# Altium PCB smol.PcbDoc
Units mil, origin at the board's own origin, x right, y up, seen from the top; angles counter-clockwise.
Board outline 835 x 1335 mil, 2 copper layers (Top Layer, Bottom Layer); 16 components, 10 nets, 49 pads, 22 vias.
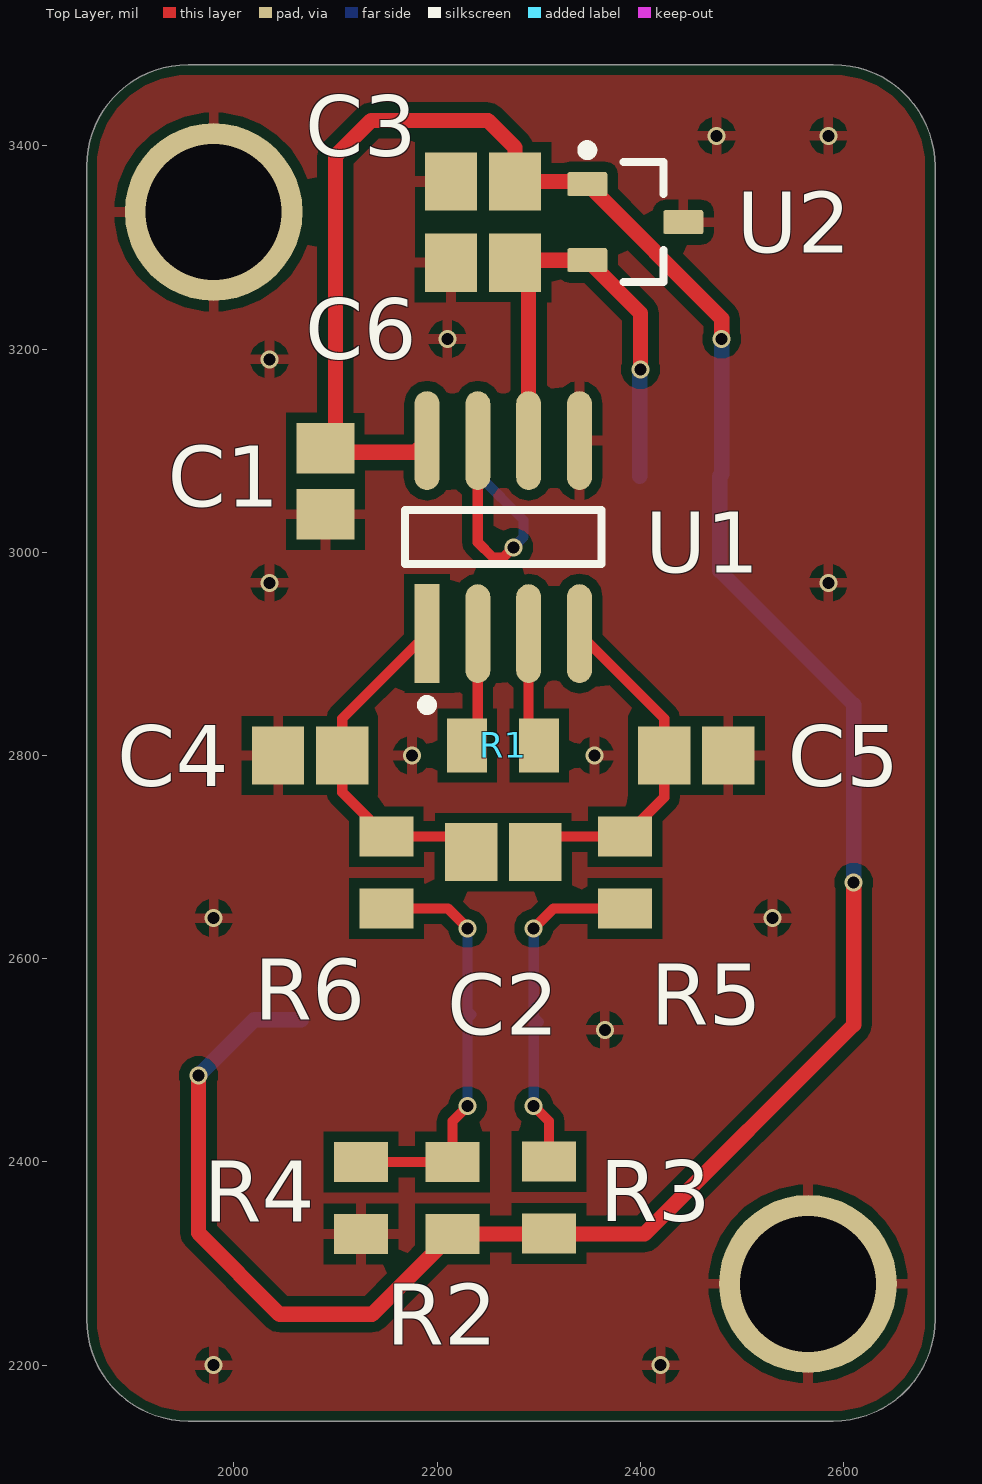
[diagram p0: Top Layer view]
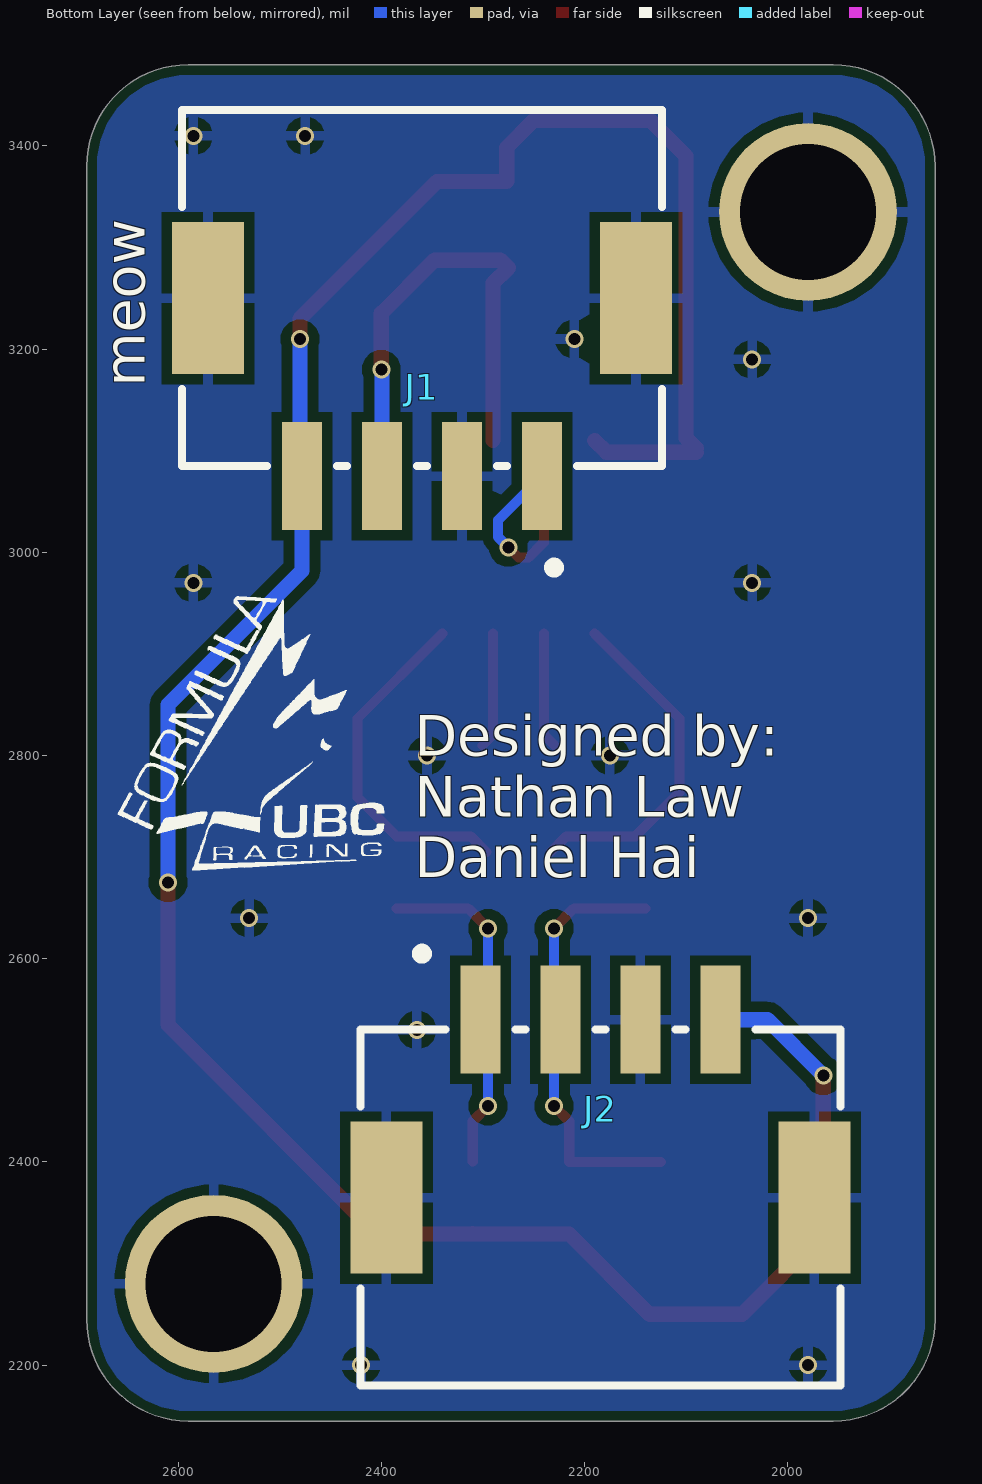
[diagram p1: Bottom Layer view, seen from below]
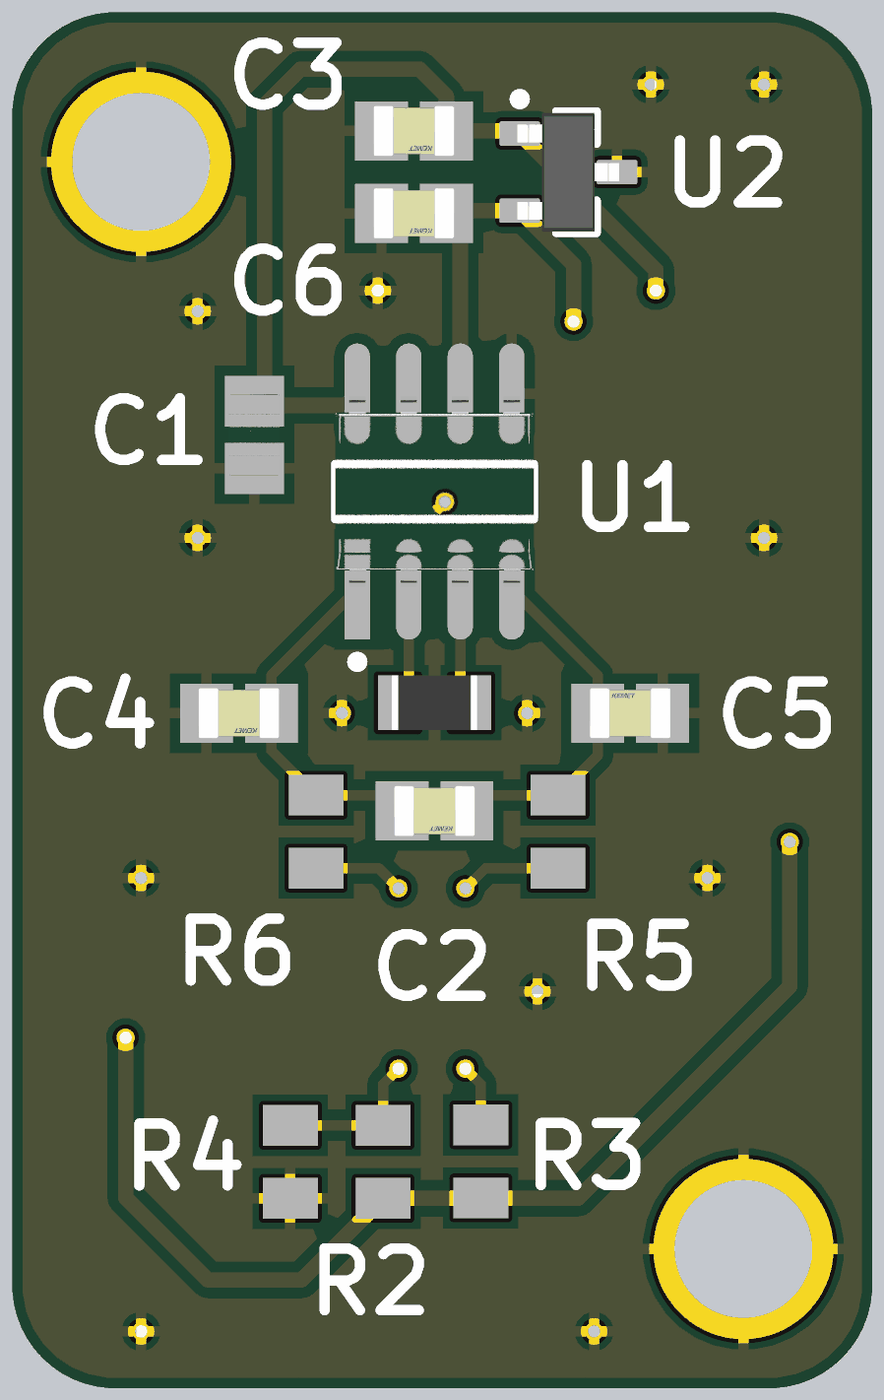
[diagram p2: 3D render of the assembled board from above, using the file's embedded part models]

## Layer stack, top to bottom
Top Solder: solder mask 0.4, Solder Resist, Dk 3.5
Top Layer: signal copper 1.4
Dielectric 1: dielectric 12.6, FR-4, Dk 4.8
Bottom Layer: signal copper 1.4
Bottom Solder: solder mask 0.4, Solder Resist, Dk 3.5

## Board outline
1855,2245 1855,3380 cw(c1955,3380) 1955,3480 2590,3480 cw(c2590,3380) 2690,3380 2690,2245 cw(c2590,2245) 2590,2145 1955,2145 cw(c1955,2245)

## Design rules (kind name [scope] priority, off if disabled: settings)
BoardOutlineClearance [All] p1: gap=10 ignorepadtopadclearanceinfootprint=FALSE
Clearance Clearance_Small_Pitch_Components [HasFootprint('TI-DBz3_n') vs HasFootprint('TI-DBz3_n')] p1: gap=6 ignorepadtopadclearanceinfootprint=TRUE
Clearance [All] p2: gap=10 ignorepadtopadclearanceinfootprint=TRUE
HoleSize [All] p1: absolutevalues=TRUE maxlimit=150 minlimit=5.91 maxpercent=80.000 minpercent=20.000
MinimumSolderMaskSliver [All] p1: minsoldermaskwidth=5
PolygonConnect [All] p1: connectstyle=Relief reliefconductorwidth=10 reliefentries=4 polygonreliefangle="90 Angle" airgapwidth=10
RoutingVias [All] p1: holewidth=11.81 width=17.72 viastyle="Through Hole" minholewidth=11.81 minwidth=17.7 maxholewidth=11.85 maxwidth=17.8
SolderMaskExpansion [All] p1: expansion=4 istentingtop=FALSE
SupplyNets "Schematic Supply Nets_1" [InNet('GND')] p1: voltage=0.000
SupplyNets "Schematic Supply Nets" [InNet('+5')] p2: voltage=0.000
UnRoutedNet [All] p1: checkbadconnections=TRUE
Width 2V5 [InNet('2V5_REF')] p1: maxlimit=15 minlimit=15 preferedwidth=15
Width 5V [InNet('+5')] p2: maxlimit=15 minlimit=15 preferedwidth=15
Width [All] p3: maxlimit=10 minlimit=10 preferedwidth=10
27 further rules are at their usual default settings.

## Components (designator, comment, footprint, x,y, rotation, side; value= is the part's Value field where it differs from the comment)
C1 "CL21B105KBFNNNG" FP-CL21-IPC_B 2090,3070 r270 top
C2 "C0805C104K5RACTU" FP-C0805C-DN-IPC_B 2265,2705 r180 top value="0.10 μF"
C3 "C0805C104K5RACTU" FP-C0805C-DN-IPC_B 2245,3365 r180 top value="0.10 μF"
C4 "C0805C104K5RACTU" FP-C0805C-DN-IPC_B 2075,2800 r180 top value="0.10 μF"
C5 "C0805C104K5RACTU" FP-C0805C-DN-IPC_B 2455,2800 r0 top value="0.10 μF"
C6 "C0805C104K5RACTU" FP-C0805C-DN-IPC_B 2245,3285 r180 top value="0.10 μF"
J1 "SM04B-PASS-TBT(LF)(SN)" FP-SM04B-PASS-TBT_LF_SN-MFG 2360,3260 r180 bottom
J2 "SM04B-PASS-TBT(LF)(SN)" FP-SM04B-PASS-TBT_LF_SN-MFG 2184.37,2354.96 r0 bottom
R1 "RC0805FR-07470RL" RESC2013X60X35NL10T20 2265,2810 r180 top
R2 "1k" RESC2013X60X35NL10T20 2215,2364.57 r270 top
R3 "1k" RESC2013X60X35NL10T20 2310,2365 r270 top
R4 "1k" RESC2013X60X35NL10T20 2125,2364.57 r90 top
R5 "1k" RESC2013X60X35NL10T20 2385,2685 r90 top
R6 "1k" RESC2013X60X35NL10T20 2150,2685 r90 top
U1 "INA826AIDR" FP-D0008A-IPC_A 2265,3015.02 r90 top
U2 "REF3325AIDBZR" DBZ0003A_N 2395,3325 r0 top

## Footprints (in the part's own frame and the unit in brackets; to place one, negate y for a bottom-side part, rotate by r counter-clockwise, add the part's x,y. Pads: shape width x height; smd on the part's side, far side on the other; paste and mask are expansions set on the pad)
DBZ0003A_N [mm] "SOT23, 3-Leads, Body 3.04x1.4mm, Pitch 0.95mm, IPC Medium Density"
  rrect17% 1x0.6 smd: 1(-1.2,0.95) 2(-1.2,-0.95) 3(1.2,0)
  silkscreen extent -1.32,-1.5 0.7,1.92, body extent -1.26,-1.46 1.26,1.46, height 0.96
FP-C0805C-DN-IPC_B [mil]
  rect 51.36x57.33 smd paste+0 mask+0: 1(-31.53,0) 2(31.53,0)
  body extent -67,-39 67,39, height 10
FP-CL21-IPC_B [mil]
  rect 49.4x57.33 smd paste+0 mask+0: 1(-32.51,0) 2(32.51,0)
  body extent -67,-39 67,39, height 10
FP-D0008A-IPC_A [mil]
  rect 97.21x24.49 smd paste+0 mask+0: 1(-95.02,75)
  rrect100% 97.21x24.49 smd paste+0 mask+0: 2(-95.02,25) 3(-95.02,-25) 4(-95.02,-75) 5(95.02,-75) 6(95.02,-25) 7(95.02,25) 8(95.02,75)
  silkscreen extent -170,-97 27,97, body extent -163,-116 163,116, height 10
FP-SM04B-PASS-TBT_LF_SN-MFG [mm]
  rect 1x2.7 smd paste+0 mask+0: 1(3,-4.7) 2(1,-4.7) 3(-1,-4.7) 4(-3,-4.7)
  rect 1.8x3.8 smd paste+0 mask+0: 5(-5.35,-0.25) 6(5.35,-0.25)
  silkscreen extent -6,-7.11 6,4.45, body extent -6.01,-5.48 5.99,4.52, height 5.8
RESC2013X60X35NL10T20 [mm] "Chip Resistor, 2-Leads, Body 2.1x1.35mm, IPC Medium Density"
  rect 1x1.35 smd: 1(-0.9,0) 2(0.9,0)
  body extent -1.05,-0.68 1.05,0.67, height 0.6

## Part data
C1: library part CMP-13271-001433-1, "CL21 Series 0805 1uF 50V ±10% Tolerance X7R Multilayer Ceramic Chip Capacitor", Capacitance=1uF, Case Code (Imperial)=0805, Case Code (Metric)=2012, Dielectric=X7R, Max Operating Temperature=125°C, Min Operating Temperature=-55°C, Package Quantity=3000, Tolerance=10%, Voltage=50V, Case/Package=0805, Contact Plating=Tin, Depth=1.25mm, Length=2mm, Material=Ceramic, Mount="Surface Mount", Packaging="Tape and Reel", Termination=Wraparound, Thickness=0.053inch, Voltage Rating=50V, Width=0.049inch
C2 C3 C4 C5 C6: library part CMP-2007-00279-2, "CAP CER 0.1UF 50V X7R 0805", Capacitance="0.10 μF", Manufacturer=KEMET, Package=C0805C-DN, Temperature="-55°C to +125°C", Temperature Characteristic=X7R, Temperature Coefficient=30ppm/°C, Temperature Range High=+125°C, Temperature Range Low=-55°C, Tolerance=0.1, Voltage Rating="50 V", Automotive=No, Category=Cap, ComponentLink2Description=Datasheet, ComponentLink2URL=https://content.kemet.com/datasheets/KEM_C1003_C0G_SMD.pdf, Device Class L1="Passive Components", Device Class L2=Capacitors, Device Class L3="Ceramic Capacitors", Digikey Description="CAP CER 0.1UF 50V X7R 0805", Height=0.88mm, Ipc Land Pattern Name=CAPC200125X78, Lead Free=Yes, Manufacturer Part Number=C0805C104K5RACTU, Material=Ceramic, Mouser Description="Cap Ceramic 0.1uF 50V X7R 10% SMD 2.0 x 1.2 mm 125 C Paper T/R", Octopart=https://octopart.com/c0805c104k5ractu-kemet-143926, RoHS=TRUE
J1 J2: library part CMP-2000-07078-2, "CONN HEADER SMD R/A 4POS 2MM", Current Rating=3A, Manufacturer=JST, Temperature="-25°C to +85°C", Temperature Range High=+85°C, Temperature Range Low=-25°C, Voltage Rating=250V, Automotive=No, Category=Conn, ComponentLink2Description=Datasheet, ComponentLink2URL=http://www.jst-mfg.com/product/pdf/eng/ePA-F.pdf, Conn Gender=Male, Conn Orientation="Right Angle", Contact Material=Tin, Device Class L1=Connectors, Device Class L2="Headers and Wire Housings", Device Class L3=unset, Digikey Description="CONN HEADER SMD R/A 4POS 2MM", Height=5.7mm, Lead Free=Yes, Manufacturer Part Number=SM04B-PASS-TBT(LF)(SN), Number Of Contacts=4, Number of Rows=1, Octopart=https://octopart.com/sm04b-pass-tbt%28lf%29%28sn%29-jst-3990422, Package=SM04B-PASS-TBT(LF)(SN), Pitch=2mm, RoHS=TRUE
R1: library part CMP-2000-06961-1, "Chip Resistor, 470 Ohm, +/- 1%, 125 mW, -55 to 155 degC, 0805 (2012 Metric), RoHS, Tape and Reel", Manufacturer=Yageo, Package Description="2-Pin Surface Mounted Device, Body 2 x 1.25 mm", Package Reference=0805, Power Rating=250mW, Resistance=470, Resistance Tolerance=±1%, Resistor Case Style=0805[2012Metric], Resistor Element Type=ThickFilm, Temperature Coefficient=±100ppm/°C, Voltage Rating=150V, Automotive Qualification Standard=-, Datasheet URL=http://www.yageo.com/documents/recent/PYu-RC_Group_51_RoHS_L_7.pdf, Datasheet Version="Rev. 7, 05/2017", Manufacturer URL=http://www.yageo.com/, Mounting Technology=SurfaceMount, MSL=MSL1-Unlimited, Packaging=Tape&Reel, Product Range=-, SVHC=ToBeAdvised
R2 R3 R4 R5 R6: library part CMP-2001-04511-1, Manufacturer=Yageo, Part Number=AC0805JR-071KL
U1: library part CMP-0944-00042-3, "IC INST AMP 1 CIRCUIT 8SOIC", Case/Package=D, Input Bias Current=65nA, Input Offset Voltage (Vos)=150uV, Input Resistance=100kR, Input Voltage Noise Density="18nV/sqrt Hz", Max Dual Supply Voltage=18V, Max Operating Temperature=125°C, Max Supply Voltage=36V, Min Dual Supply Voltage=1.35V, Min Operating Temperature=-40°C, Min Supply Voltage=2.7V, Nominal Supply Current=200uA, Output Current=16mA, Package Quantity=1, Power Supply Rejection Ratio (PSRR)=100dB, Voltage Gain=60dB, -3db Bandwidth=1MHz, Bandwidth=1MHz, Common Mode Rejection Ratio=84dB, Lead Free="Lead Free", Number of Amplifiers=1, Number of Channels=1, Number of Circuits=1, Number of Elements=1, Number of Pins=8, Operating Supply Current=200uA, Output Current per Channel=16mA, Packaging="Tape and Reel", Quiescent Current=200uA, Radiation Hardening=No, REACH SVHC="No SVHC", RoHS Compliant=Yes, Series=-, Slew Rate=1V/µs, Supply Current=200uA
U2: library part CMP-0367-00131-2, "30 ppm / degC Drift, 3.9 uA Voltage Reference, -40 to 125 degC, 3-pin SOT-23 (DBZ), Green (RoHS & no Sb/Br)", Manufacturer="Texas Instruments", Rating=Catalog, Temp Coeff(Max)(ppm/ degree C)=30, Temp Coeff(Typ)(ppm/ degree C)=8, Code_JEDEC=TO-236, ComponentLink1Description="Manufacturer URL", ComponentLink1URL=http://www.ti.com/, ComponentLink2Description=Datasheet, ComponentLink2URL=http://www.ti.com/general/docs/lit/getliterature.tsp?genericPartNumber=REF3325&fileType=pdf, ComponentLink3Description="Package Specification", ComponentLink3URL=http://www.ti.com/litv/pdf/mpds108a, DatasheetVersion=SBOS392A, Eco-Plan="Green (RoHS & no Sb/Br)", Initial Accuracy @ 25/deg C(%)=0.15, Iout/Iz(Max)(mA)=5, Iq(Max)(uA)=5, Mounting Technology="Surface Mount", PackageDescription="3-Pin Plastic Small Outline, Body 2.92 x 1.3 mm, Pitch 0.95 mm", PackageReference=DBZ0003A, PackageVersion=4203227/B, PartNumber=REF3325AIDBZR, SubFamily="Series Voltage Reference", VI(Max)(V)=5.5, VI(Min)(V)=2.66, VO(V)=2.5

## Free pads (board coordinates)
  round 175 hole 133.86: 12(1980,3335) 13(2565,2280)

## Via types
v1: diameter 17.72, hole 11.81, Top Layer to Bottom Layer, 22 vias

## Nets (pads, with @x,y where several pads share a name; then routed paths per layer and width w, separated by ;. In a path a pad name is that pad's centre, name@x,y a point inside that pad or via, vN(x,y) a via of type N, cw(c..) or ccw(c..) an arc to the next point about the centre after c; other vN are vias at no path point)
2V5_REF: C6.1 J1.3 U1.6 U2.2 | length 486.6
  Top Layer w15: U1.6 2290,3265 2275,3280 2282.6,3287.6 U2.2 2400,3235.35 v1(2400,3180)
  Bottom Layer w15: J1.3 2399.37,3179.37 v1(2400,3180)
+5: C1.1 C3.1 J1.4 J2.4 R2.2 R3.2 U1.8 U2.1 | length 2717.6
  Top Layer w15: v1(1965,2485) 1965,2330 2045,2250 2135.87,2250 R2.2 R3.2@2309.57,2329.13 ; C1.1@2090,3098.57 2178.53,3098.57 U1.8 ; C1.1 2100,3112.51 2100,3390 2135,3425 2250,3425 2276.53,3398.47 C3.1 2345.16,3365 U2.1 2480,3230.16 v1(2480,3210) ; R3.2 R3.2@2309.57,2329.13 ; v1(2610,2675) 2610,2535 2404.13,2329.13 R3.2@2309.57,2329.13
  Bottom Layer w15: v1(1965,2485) 2020,2540 J2.4 ; v1(2480,3210) 2480,3076.85 J1.4 2478.11,2981.89 2610,2850 v1(2610,2675)
AMP_OUT: J1.1 U1.7 | length 237.4
  Top Layer w10: U1.7 2240,3010 2255,2995 2265,2995 v1(2275,3005)
  Bottom Layer w10: J1.1 2285,3031.85 2285,3015 v1(2275,3005)
GND: C1.2 C3.2 C4.2 C5.2 C6.2 J1.2 J1.5 J1.6 J2.3 J2.5 J2.6 pad.12 pad.13 R4.1 U1.5 U2.3
  other v1: 1980,2200 2420,2200 2365,2530 1980,2640 2530,2640 2175,2800 2355,2800 2035,2970 2585,2970 2035,3190 2210,3210 2475,3410 2585,3410
NetR1_1: R1.1 U1.3 | length 114.3
  Top Layer w10: U1.3 2290,2820.43 R1.1
NetR1_2: R1.2 U1.2 | length 114.3
  Top Layer w10: R1.2 2240,2820.43 U1.2
S+: C2.1 C5.1 R5.2 U1.4 | length 344.9
  Top Layer w10: C2.1 2311.96,2720.43 R5.2 2423.47,2758.91 C5.1 2423.47,2836.53 U1.4
S-: C2.2 C4.1 R6.2 U1.1 | length 342
  Top Layer w10: U1.1 2106.53,2836.53 C4.1 2106.53,2763.91 R6.2 2218.04,2720.43 C2.2
UFS+: J2.1 R3.1 R5.1 | length 347.6
  Top Layer w10: v1(2295,2455) 2310,2440 R3.1 ; v1(2295,2630) 2314.57,2649.57 R5.1
  Bottom Layer w10: v1(2295,2455) J2.1@2295,2542.68 ; v1(2295,2630) J2.1@2295,2547.4 ; J2.1@2300,2537.68 J2.1@2295,2542.68 ; J2.1@2295,2542.68 J2.1@2295,2547.4 ; J2.1@2295,2542.68 2292.64,2545.04 J2.1@2295,2547.4
UFS-: J2.2 R2.1 R4.2 R6.1 | length 434.5
  Top Layer w10: R4.2 R2.1 2215,2440 v1(2230,2455) ; R6.1@2140,2649.57 2210.43,2649.57 v1(2230,2630)
  Bottom Layer w10: v1(2230,2455) J2.2@2230,2541.46 ; v1(2230,2630) J2.2@2230,2548.62 ; J2.2@2230,2541.46 2233.58,2545.04 J2.2@2230,2548.62 ; J2.2@2230,2541.46 J2.2@2230,2548.62

## Polygon pours and split planes (outlines as drawn)
GND on Top Layer "NONET_L-01_P-001" (solid, pour order 0): 1855,3480 2690,3480 2690,2145 1855,2145
GND on Bottom Layer "NONET_L-01_P-001" (solid, pour order 1): 1855,3480 2690,3480 2690,2145 1855,2145

## Silkscreen, mask and mechanical layers (free items; w line width, h text height)
Bottom Overlay:
  drawing of 29 lines, arcs and shapes, not listed
  text "meow" at 2633,3163 h40 r270
  text "Designed by: / Nathan Law / Daniel Hai" at 2366.87,2680 h40
Mechanical 1:
  the board outline again, w5